# EAGLE board demo (EAGLE 7.2.0)
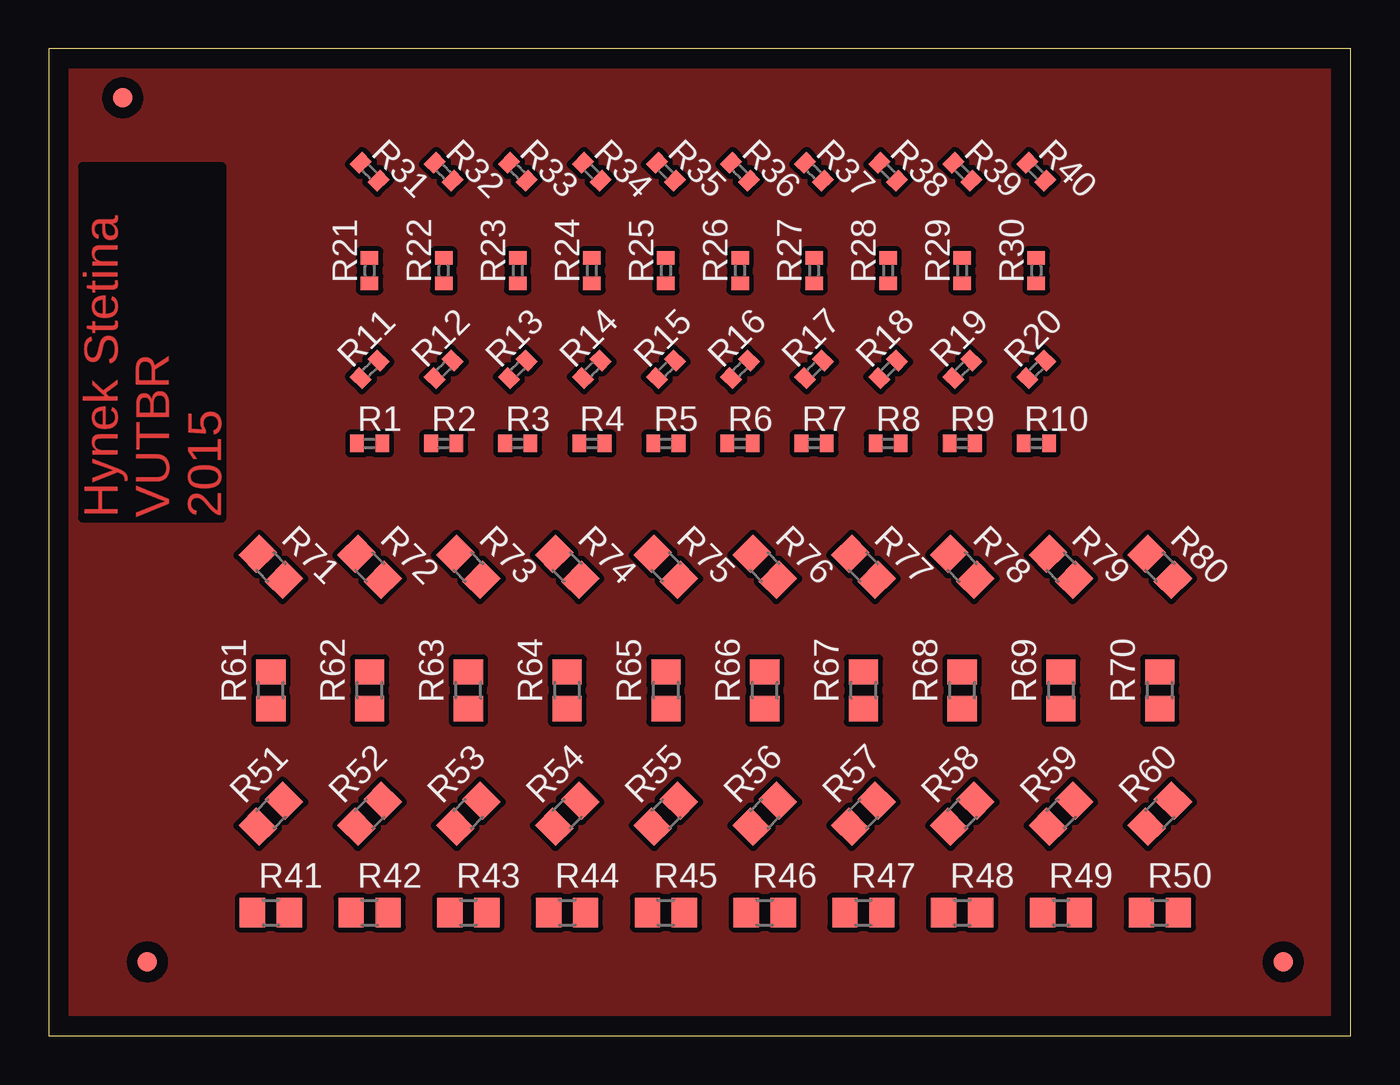
[diagram p0: board, top side]

Size 66.98 x 50.79 mm. Coordinates in mm from the lower left corner, seen from the top.
Outline: 0,0 66.98,0 66.98,50.79 0,50.79 0,0
Copper layers (1*16): Top 0.035mm / dielectric 1.5mm / Bottom 0.035mm
Design rules "default *": minimum track width 10mil, minimum drill 24mil, track to track 10mil, track to pad 10mil, pad to pad 10mil, via to via 10mil, smd to smd 10mil, copper to edge 40mil, drill to drill 8mil, minimum pad ring 10mil, minimum via ring 8mil, stop-mask expansion 4mil, vias tented up to drill 0mil, thermal gap 10mil

## Footprints (pad centres in the part's own frame; a part is rotated, then mirrored left to right if it is on the bottom)
R0402 = smd 0.7 x 0.9: 1 -0.65,0; 2 0.65,0
R0805 = smd 1.3 x 1.5: 1 -0.95,0; 2 0.95,0
FIDUCIAL_1MM = smd 1 x 1: 1 0,0

## Placement (x,y rotation side)
R1  1k  [R0402]  16.51,30.48 0 top
R2  1k  [R0402]  20.32,30.48 0 top
R3  1k  [R0402]  24.13,30.48 0 top
R4  1k  [R0402]  27.94,30.48 0 top
R5  1k  [R0402]  31.75,30.48 0 top
R6  1k  [R0402]  35.56,30.48 0 top
R7  1k  [R0402]  39.37,30.48 0 top
R8  1k  [R0402]  43.18,30.48 0 top
R9  1k  [R0402]  46.99,30.48 0 top
R10  1k  [R0402]  50.8,30.48 0 top
R11  1k  [R0402]  16.51,34.29 45 top
R12  1k  [R0402]  20.32,34.29 45 top
R13  1k  [R0402]  24.13,34.29 45 top
R14  1k  [R0402]  27.94,34.29 45 top
R15  1k  [R0402]  31.75,34.29 45 top
R16  1k  [R0402]  35.56,34.29 45 top
R17  1k  [R0402]  39.37,34.29 45 top
R18  1k  [R0402]  43.18,34.29 45 top
R19  1k  [R0402]  46.99,34.29 45 top
R20  1k  [R0402]  50.8,34.29 45 top
R21  1k  [R0402]  16.51,39.37 90 top
R22  1k  [R0402]  20.32,39.37 90 top
R23  1k  [R0402]  24.13,39.37 90 top
R24  1k  [R0402]  27.94,39.37 90 top
R25  1k  [R0402]  31.75,39.37 90 top
R26  1k  [R0402]  35.56,39.37 90 top
R27  1k  [R0402]  39.37,39.37 90 top
R28  1k  [R0402]  43.18,39.37 90 top
R29  1k  [R0402]  46.99,39.37 90 top
R30  1k  [R0402]  50.8,39.37 90 top
R31  1k  [R0402]  16.51,44.45 315 top
R32  1k  [R0402]  20.32,44.45 315 top
R33  1k  [R0402]  24.13,44.45 315 top
R34  1k  [R0402]  27.94,44.45 315 top
R35  1k  [R0402]  31.75,44.45 315 top
R36  1k  [R0402]  35.56,44.45 315 top
R37  1k  [R0402]  39.37,44.45 315 top
R38  1k  [R0402]  43.18,44.45 315 top
R39  1k  [R0402]  46.99,44.45 315 top
R40  1k  [R0402]  50.8,44.45 315 top
R41  10k  [R0805]  11.43,6.35 0 top
R42  10k  [R0805]  16.51,6.35 0 top
R43  10k  [R0805]  21.59,6.35 0 top
R44  10k  [R0805]  26.67,6.35 0 top
R45  10k  [R0805]  31.75,6.35 0 top
R46  10k  [R0805]  36.83,6.35 0 top
R47  10k  [R0805]  41.91,6.35 0 top
R48  10k  [R0805]  46.99,6.35 0 top
R49  10k  [R0805]  52.07,6.35 0 top
R50  10k  [R0805]  57.15,6.35 0 top
R51  10k  [R0805]  11.43,11.43 45 top
R52  10k  [R0805]  16.51,11.43 45 top
R53  10k  [R0805]  21.59,11.43 45 top
R54  10k  [R0805]  26.67,11.43 45 top
R55  10k  [R0805]  31.75,11.43 45 top
R56  10k  [R0805]  36.83,11.43 45 top
R57  10k  [R0805]  41.91,11.43 45 top
R58  10k  [R0805]  46.99,11.43 45 top
R59  10k  [R0805]  52.07,11.43 45 top
R60  10k  [R0805]  57.15,11.43 45 top
R61  10k  [R0805]  11.43,17.78 90 top
R62  10k  [R0805]  16.51,17.78 90 top
R63  10k  [R0805]  21.59,17.78 90 top
R64  10k  [R0805]  26.67,17.78 90 top
R65  10k  [R0805]  31.75,17.78 90 top
R66  10k  [R0805]  36.83,17.78 90 top
R67  10k  [R0805]  41.91,17.78 90 top
R68  10k  [R0805]  46.99,17.78 90 top
R69  10k  [R0805]  52.07,17.78 90 top
R70  10k  [R0805]  57.15,17.78 90 top
R71  10k  [R0805]  11.43,24.13 315 top
R72  10k  [R0805]  16.51,24.13 315 top
R73  10k  [R0805]  21.59,24.13 315 top
R74  10k  [R0805]  26.67,24.13 315 top
R75  10k  [R0805]  31.75,24.13 315 top
R76  10k  [R0805]  36.83,24.13 315 top
R77  10k  [R0805]  41.91,24.13 315 top
R78  10k  [R0805]  46.99,24.13 315 top
R79  10k  [R0805]  52.07,24.13 315 top
R80  10k  [R0805]  57.15,24.13 315 top
U$1  FIDUCIAL  [FIDUCIAL_1MM]  5.08,3.81 0 top
U$2  FIDUCIAL  [FIDUCIAL_1MM]  3.81,48.26 0 top
U$3  FIDUCIAL  [FIDUCIAL_1MM]  63.5,3.81 0 top

## Library data of the parts
R1-R80 = rcl
U$1-U$3 = adafruit

## Tracks (layer width: path | path; a pad name or v marks a point on that pad's centre or on a via)
N$1
  pour Top: 0,0 67.31,0 67.31,50.8 0,50.8

## Text on the board
Top: Hynek Stetina / VUTBR / 2015